# EAGLE board Schablone_Schüler (EAGLE 5.09)

Size 230 x 160 mm. Coordinates in mm from the lower left corner, seen from the top.
Outline: 0,160 230,160 230,0 0,0 0,160
Copper layers (1*16): Top 0.035mm / dielectric 1.5mm / Bottom 0.035mm
Design rules "default": minimum track width 10mil, minimum drill 24mil, track to track 8mil, track to pad 8mil, pad to pad 8mil, via to via 8mil, smd to smd 8mil, copper to edge 40mil, drill to drill 8mil, minimum pad ring 10mil, minimum via ring 8mil, stop-mask expansion 4mil, vias tented up to drill 0mil, thermal gap 10mil
Holes 0.6 mm at 220,150 220,10 10,10 10,150

## Footprints (pad centres in the part's own frame; a part is rotated, then mirrored left to right if it is on the bottom)
4,1 = hole 4.1: 0,0
3,0 = hole 3: 0,0
3,2 = hole 3.2: 0,0

## Placement (x,y rotation side)
E$1  [4,1]  54,150 0 top
E$2  [4,1]  74,150 0 top
E$3  [4,1]  94,150 0 top
E$4  [4,1]  114,150 0 top
E$5  [4,1]  134,150 0 top
E$6  [4,1]  154,150 0 top
E$7  [4,1]  174,150 0 top
E$8  [4,1]  194,150 0 top
E$9  [4,1]  54,10 0 top
E$10  [4,1]  74,10 0 top
E$11  [4,1]  94,10 0 top
E$12  [4,1]  114,10 0 top
E$13  [4,1]  134,10 0 top
E$14  [4,1]  154,10 0 top
E$15  [4,1]  174,10 0 top
E$16  [4,1]  194,10 0 top
E$17  [4,1]  54,130 0 top
E$18  [4,1]  74,130 0 top
E$19  [4,1]  94,130 0 top
E$20  [4,1]  114,130 0 top
E$21  [4,1]  134,130 0 top
E$22  [4,1]  154,130 0 top
E$23  [4,1]  174,130 0 top
E$24  [4,1]  194,130 0 top
E$25  [4,1]  54,110 0 top
E$26  [4,1]  74,110 0 top
E$27  [4,1]  94,110 0 top
E$28  [4,1]  114,110 0 top
E$29  [4,1]  134,110 0 top
E$30  [4,1]  154,110 0 top
E$31  [4,1]  174,110 0 top
E$32  [4,1]  194,110 0 top
E$33  [4,1]  54,90 0 top
E$34  [4,1]  74,90 0 top
E$35  [4,1]  94,90 0 top
E$36  [4,1]  114,90 0 top
E$37  [4,1]  134,90 0 top
E$38  [4,1]  154,90 0 top
E$39  [4,1]  174,90 0 top
E$40  [4,1]  194,90 0 top
E$41  [4,1]  54,70 0 top
E$42  [4,1]  74,70 0 top
E$43  [4,1]  94,70 0 top
E$44  [4,1]  114,70 0 top
E$45  [4,1]  134,70 0 top
E$46  [4,1]  154,70 0 top
E$47  [4,1]  174,70 0 top
E$48  [4,1]  194,70 0 top
E$49  [4,1]  54,50 0 top
E$50  [4,1]  74,50 0 top
E$51  [4,1]  94,50 0 top
E$52  [4,1]  114,50 0 top
E$53  [4,1]  134,50 0 top
E$54  [4,1]  154,50 0 top
E$55  [4,1]  174,50 0 top
E$56  [4,1]  194,50 0 top
E$57  [3,0]  184,141 0 top
E$58  [4,1]  54,30 0 top
E$59  [4,1]  74,30 0 top
E$60  [4,1]  94,30 0 top
E$61  [4,1]  114,30 0 top
E$62  [4,1]  134,30 0 top
E$63  [4,1]  154,30 0 top
E$64  [4,1]  174,30 0 top
E$65  [4,1]  194,30 0 top
E$66  [3,0]  184,121 0 top
E$67  [3,0]  184,101 0 top
E$68  [3,0]  184,81 0 top
E$69  [3,0]  184,61 0 top
E$70  [3,0]  184,41 0 top
E$71  [3,0]  184,21 0 top
H1  MOUNT-HOLE3.2  [3,2]  214.62,34.91 0 top
H2  MOUNT-HOLE3.2  [3,2]  212.71,123.18 0 top
H3  MOUNT-HOLE3.2  [3,2]  27.29,123.18 0 top
H4  MOUNT-HOLE3.2  [3,2]  27.29,36.82 0 top
H5  MOUNT-HOLE3.2  [3,2]  142.86,123.18 0 top
H6  MOUNT-HOLE3.2  [3,2]  84.44,36.82 0 top
H7  MOUNT-HOLE3.2  [3,2]  143.5,36.82 0 top
H8  MOUNT-HOLE3.2  [3,2]  84.44,123.18 0 top

## Library data of the parts
E$1-E$71 H1-H8 = holes